# Allegro board ADAPTER.brd
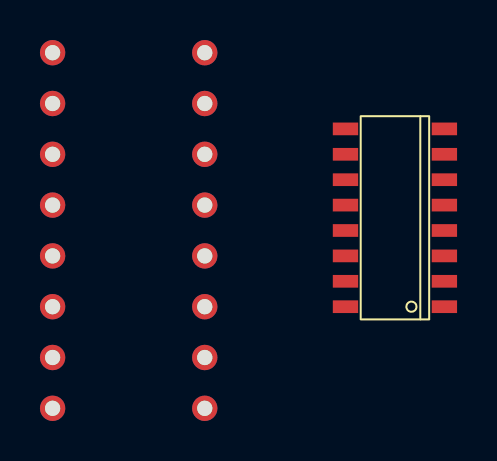
[diagram p0: board, top side]
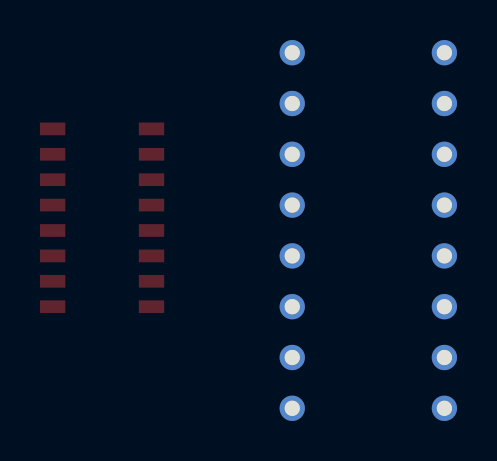
[diagram p1: board, bottom side, seen from below]

No outline. copper layers: TOP, BOTTOM. Coordinates in mm from the lowest, leftmost part position.

## Placement (name value [footprint] x y rotation side)
J1  CON8  [FGCON8_1]  7.62 5.08 90 top
J2  CON8  [FGCON8_1]  0 0 270 top
TR  CON12  [SOIC16]  17.15 3.18 180 top

## Library data of the parts
J1 = CON8
J2 = CON8_1
TR = CON12_2: Tolerance: ***; User Part Number: ***

## Footprints (pads in the part's own frame, mm; a bottom-side part is the same pattern mirrored in y, then rotated)
FGCON8_1
  round 1.27 hole 0.762: 1(-11.43,0) 2(-8.89,0) 3(-6.35,0) 4(-3.81,0) 5(-1.27,0) 6(1.27,0) 7(3.81,0) 8(6.35,0)
SOIC16
  rect 1.27x0.635 smd: 1(-2.477,4.445) 2(-2.477,3.175) 3(-2.477,1.905) 4(-2.477,0.635) 5(-2.477,-0.635) 6(-2.477,-1.905) 7(-2.477,-3.175) 8(-2.477,-4.445) 9(2.477,-4.445) 10(2.477,-3.175) 11(2.477,-1.905) 12(2.477,-0.635) 13(2.477,0.635) 14(2.477,1.905) 15(2.477,3.175) 16(2.477,4.445)

## Nets
N25391: J1.1 TR.1
N25475: J1.2 TR.2
N25487: J1.3 TR.3
N25499: J1.8 TR.8
N25514: J1.7 TR.7
N25518: J1.6 TR.6
N25575: J2.1 TR.9
N25587: J2.2 TR.10
N25599: J2.3 TR.11
N25603: J2.8 TR.16
N25615: J2.7 TR.15
N25627: J2.6 TR.14

Pads without a net: J1 4 5; J2 4 5; TR 4 5 12 13
